# Altium PCB SLT_4U_V100.PcbDoc (part 5 of 6)
Units mm, origin at the board's own origin, x right, y up, seen from the top; angles counter-clockwise.
Board outline 180 x 80 mm, 5 copper layers (Top Layer, Mid-Layer 1, Mid-Layer 2, Mid-Layer 4, Bottom Layer); 1167 components, 840 nets, 3922 pads, 254 vias.
Unrouted connection lines stored in the file: 1943.
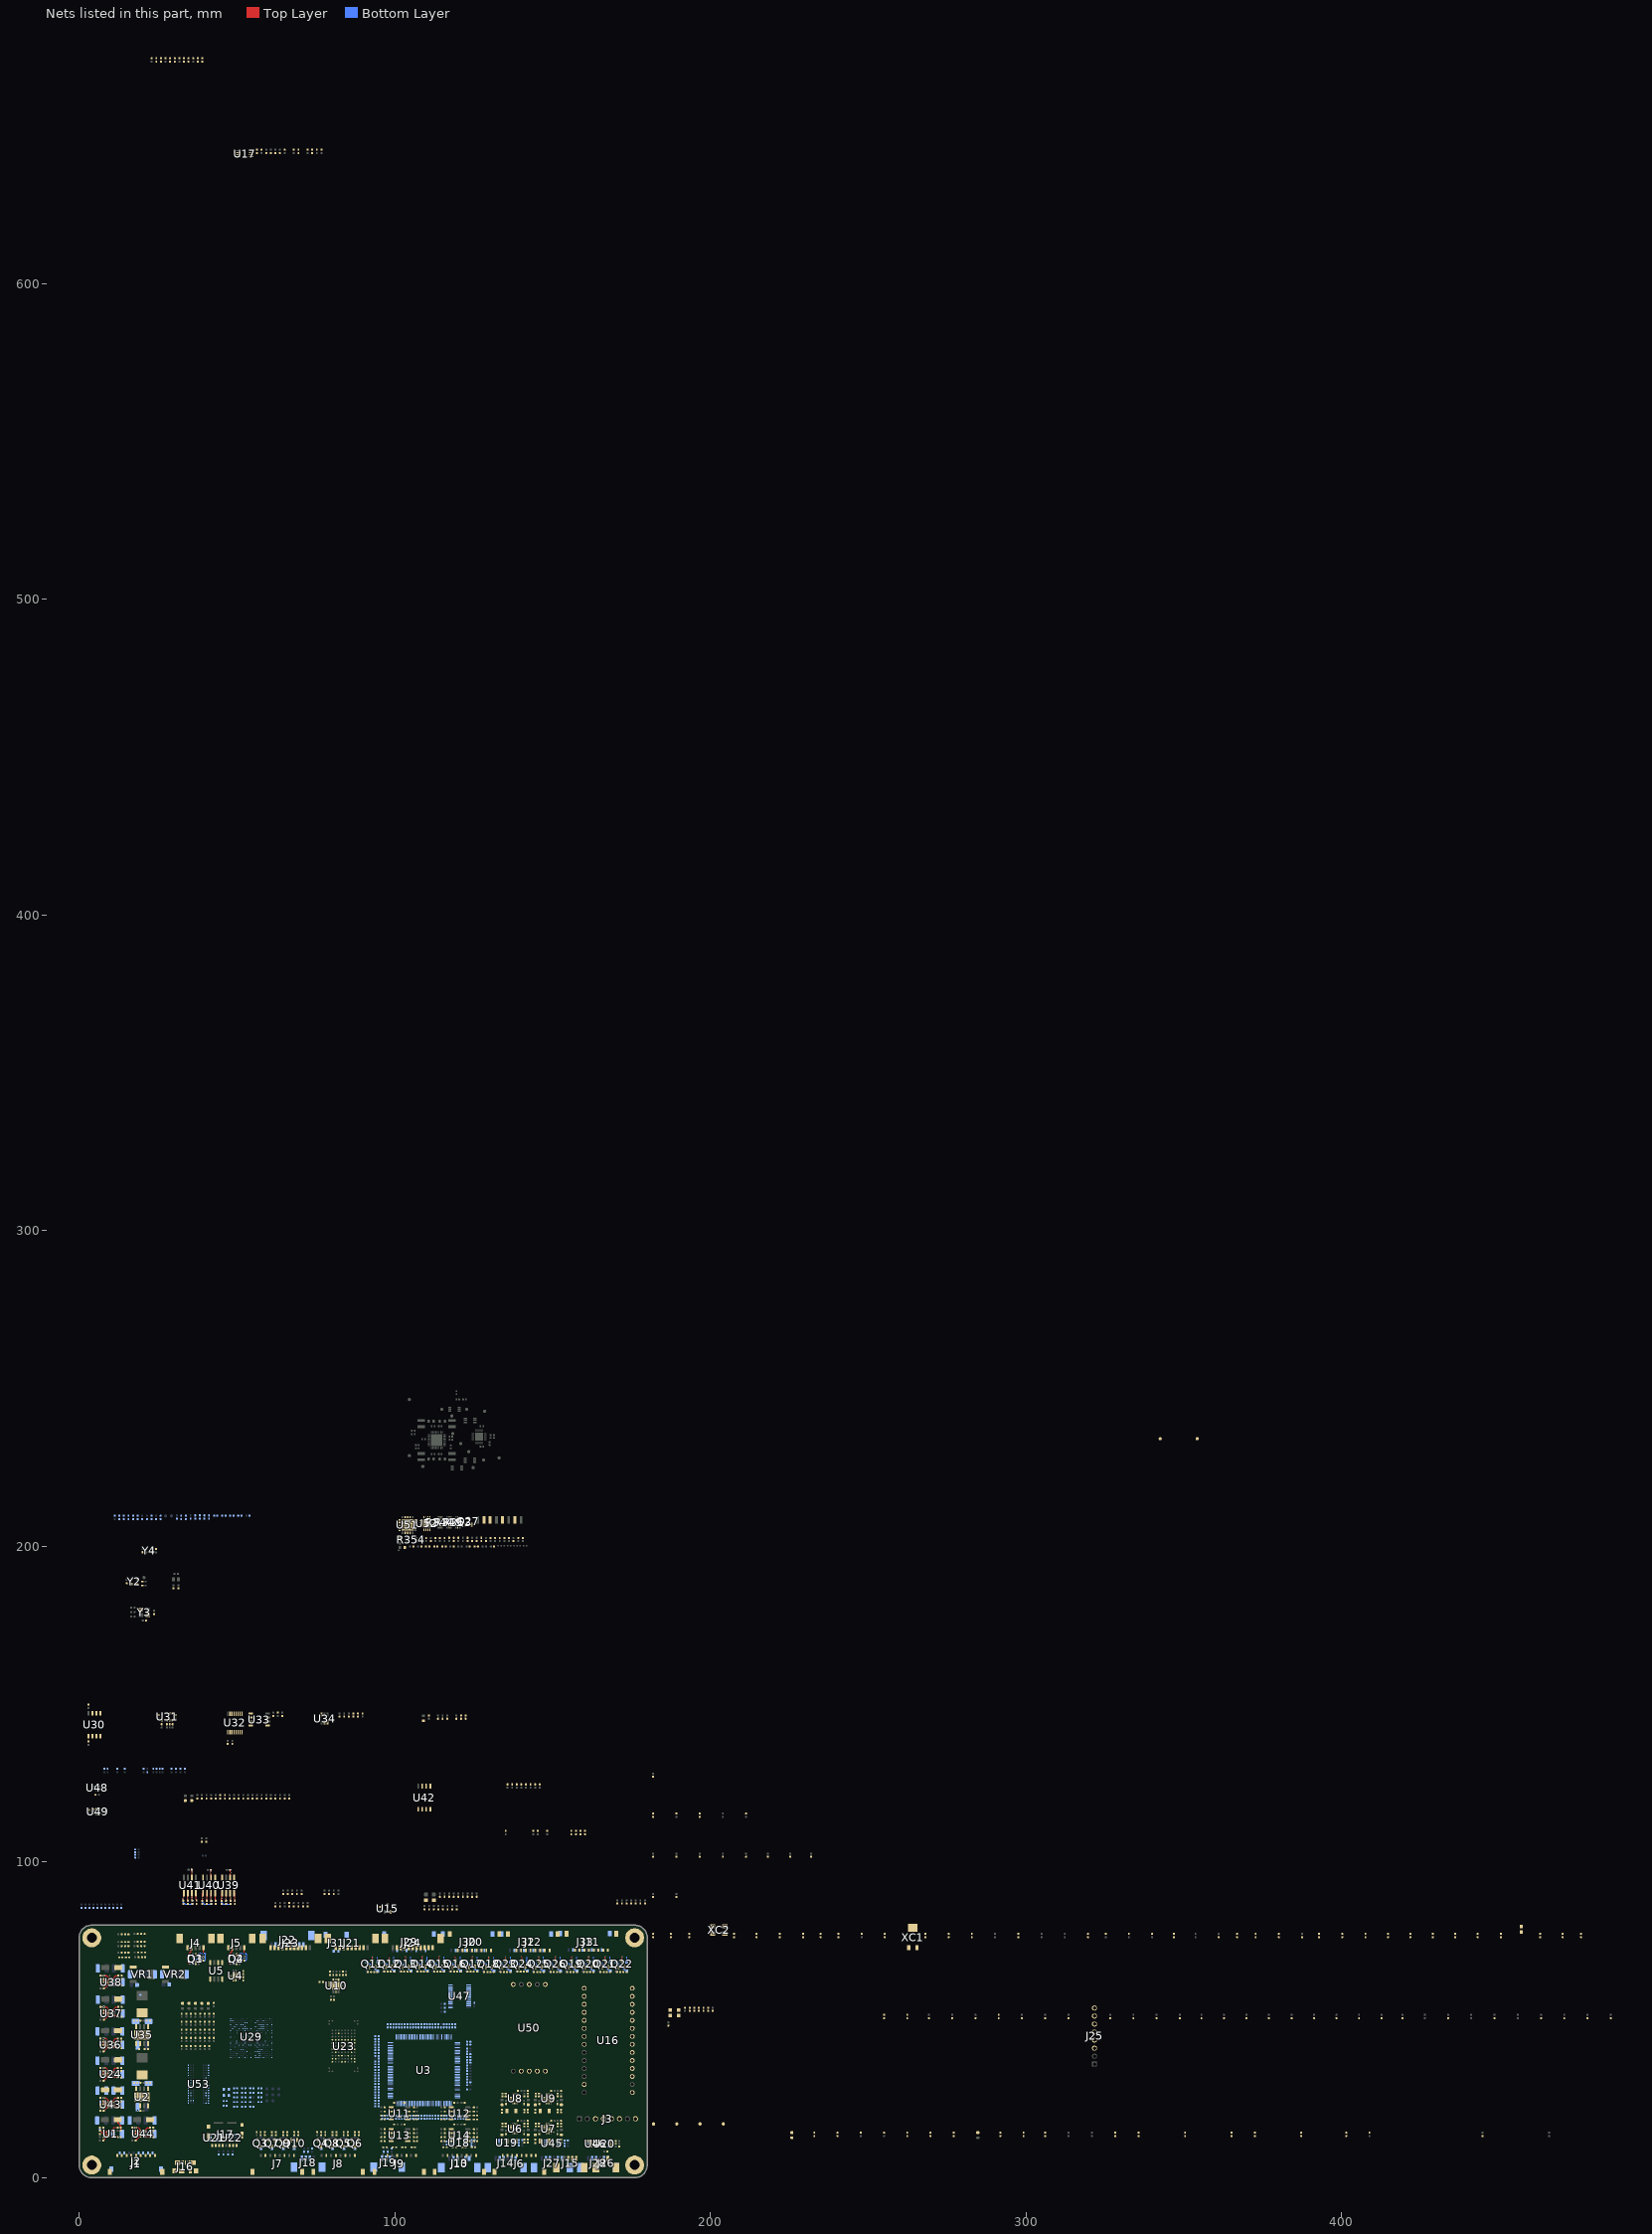
[diagram p5: the nets of this part, all layers, seen from the top]

## Via types
v1: diameter 0.4, hole 0.2, Top Layer to Bottom Layer, 235 vias
v2: diameter 0.4, hole 0.2, Top Layer to Bottom Layer, tented both sides, 18 vias
v3: diameter 0.35, hole 0.15, Top Layer to Bottom Layer, 1 vias

## Nets (pads, with @x,y where several pads share a name; then routed paths per layer and width w, separated by ;. In a path a pad name is that pad's centre, name@x,y a point inside that pad or via, vN(x,y) a via of type N, cw(c..) or ccw(c..) an arc to the next point about the centre after c; other vN are vias at no path point) (continued)
GND: C1.1 C2.1 C3.1 C4.1 C5.1 C6.1 C8.1 C9.1 C10.2 C11.1 C12.1 C13.1 C14.1 C15.1 C16.1 C17.1 C18.1 C19.1 C20.1 C21.2 C22.2 C23.1 C24.1 C25.1 C26.1 C27.1 C28.1 C29.1 C30.1 C31.1 C32.1 C33.1 C34.1 C35.1 C36.1 C37.1 C38.1 C39.1 C40.1 C41.1 C42.1 C43.1 C44.1 C45.1 C46.1 C47.1 C48.1 C49.1 C50.1 C51.1 C52.1 C53.1 C54.1 C57.1 C58.1 C61.1 C62.1 C63.1 C64.1 C65.1 C66.1 C67.1 C68.1 C69.1 C70.1 C71.1 C72.1 C73.1 C74.1 C75.1 C76.1 C79.1 C80.1 C83.1 C84.1 C85.1 C86.1 C87.1 C88.1 C89.1 C90.1 C91.1 C92.1 C93.1 C94.1 C95.1 C96.1 C97.1 C98.1 C99.1 C100.1 C101.1 C102.1 C103.1 C104.1 C105.1 C106.1 C107.1 C108.1 C109.1 C110.1 C111.1 C112.1 C113.1 C114.1 C115.1 C116.1 C117.1 C118.1 C119.1 C120.1 C121.1 C122.1 C123.1 C124.1 C125.1 C126.1 C127.1 C128.1 C129.1 C130.1 C131.1 C132.1 C133.1 C134.1 C135.1 C136.1 C137.1 C138.1 C139.1 C140.1 C141.1 C142.1 C143.1 C144.1 C145.1 C146.1 C147.2 C148.1 C149.1 C150.2 C151.2 C152.2 C153.1 C154.1 C155.1 C156.1 C157.2 C159.1 C160.1 C161.1 C162.1 C163.1 C164.1 C165.1 C166.1 C167.1 C168.1 C169.1 C170.1 C171.1 C172.1 C173.1 C174.1 C175.1 C176.1 C177.1 C178.2 C179.2 C180.2 C181.2 C182.2 C183.2 C184.2 C185.2 C186.2 C187.1 C188.1 C189.1 C190.1 C191.1 C192.1 C193.1 C194.1 C195.1 C196.1 C197.1 C198.1 C199.1 C200.1 C201.1 C202.1 C203.1 C204.1 C205.1 C206.1 C207.1 C208.1 C209.1 C210.1 C211.1 C212.1 C213.1 C214.1 C215.1 C216.1 C217.1 C218.1 C219.1 C220.1 C221.1 C223.1 C225.1 C226.1 C227.1 C228.1 C229.1 C230.1 C231.1 C232.2 C233.2 C234.2 C235.2 C236.2 C237.2 C238.2 C239.2 C240.2 C241.2 C242.2 C243.2 C244.2 C245.2 C246.2 C247.1 C248.2 C249.2 C250.2 C251.2 C252.2 C253.2 C254.2 C255.2 C256.2 C257.2 C258.2 C259.2 C260.2 C261.2 C262.2 C263.2 C264.2 C265.2 C266.2 C267.1 C268.2 C269.2 C270.2 C271.2 C272.2 C273.2 C274.2 C275.2 C276.2 C277.2 C278.2 C279.1 C280.2 C281.2 C282.1 C283.2 C284.2 C285.2 C286.2 C287.2 C288.1 C289.2 C290.1 C291.2 C292.1 C293.2 C294.2 C295.2 C296.2 C297.2 C298.2 C299.1 C300.1 C301.1 C302.1 C303.1 C304.1 C305.1 C306.1 C307.1 C308.1 C309.1 C310.1 C311.1 C312.1 C313.1 C314.1 C315.1 C316.1 C317.1 C318.1 C319.1 C320.1 C321.2 C322.2 C323.2 C324.2 C325.2 C326.2 C327.2 C328.2 C330.2 C331.2 C332.2 C333.2 C334.2 C335.2 C336.2 C337.2 C338.2 C339.2 C340.2 C341.2 C342.2 D1.2 D2.2 D3.2 D4.2 D13.2 D14.2 D15.2 D16.2 D17.2 D18.2 D19.2 H3.1 H4.1 H7.1 H8.1 J1.M1 J1.M2 J2.M1 J2.M2 J3.3 J4.5 J4.M1 J4.M2 J5.5 J5.M1 J5.M2 J6.M1 J6.M2 J7.M1 J7.M2 J8.M1 J8.M2 J9.M1 J9.M2 J10.M1 J10.M2 J11.M1 J11.M2 J12.M1 J12.M2 J13.4 J13.M1 J13.M2 J14.4 J14.M1 J14.M2 J15.4 J15.M1 J15.M2 J16.5 J16.6 J17.G1 J17.G2 J17.G3 J17.G4 J17.P6 J18.4 J18.M1 J18.M2 J19.4 J19.M1 J19.M2 J20.M1 J20.M2 J21.2 J21.M1 J21.M2 J22.2 J22.M1 J22.M2 J23.2 J23.M1 J23.M2 J24.7 J24.10 J24.M1 J24.M2 J25.3 J26.2 J26.M1 J26.M2 J27.4 J27.M1 J27.M2 J28.4 J28.M1 J28.M2 J29.M1 J29.M2 J30.M1 J30.M2 J31.M1 J31.M2 J32.M1 J32.M2 J33.M1 J33.M2 Q3.2 Q4.2 Q5.2 Q6.2 Q7.2 Q8.2 Q9.2 Q10.2 Q11.2 Q12.2 Q13.2 Q14.2 Q15.2 Q16.2 Q17.2 Q18.2 Q19.2 Q20.2 Q21.2 Q22.2 Q23.2 Q24.2 Q25.2 Q26.2 Q27.2 R5.1 R6.1 R8.1 R9.1 R10.1 R110.1 R115.2 R116.2 R122.2 R123.2 R130.2 R132.2 R138.1 R139.2 R140.2 R142.2 R146.1 R147.1 R149.1 R155.1 R156.1 R157.1 R161.1 R162.1 R163.1 R165.1 R167.1 R172.1 R173.1 R178.1 R179.1 R184.1 R185.1 R190.1 R191.1 R194.1 R196.1 R203.2 R204.1 R209.1 R213.2 R217.2 R222.1 R223.2 R224.1 R225.2 R252.2 R253.1 R254.1 R255.1 R256.1 R258.2 R259.2 R261.2 R262.2 R264.2 R265.2 R267.2 R268.2 R295.2 R297.2 R298.2 R301.1 R303.2 R307.1 R310.1 R311.2 R313.2 R315.2 R317.2 R321.1 R323.1 R338.2 R341.1 R348.2 R391.1 R394.1 R409.1 R410.1 R413.1 R414.2 R415.1 R420.1 R421.2 R422.1 R423.1 R428.1 R429.2 R430.1 R431.1 R436.1 R437.2 R438.1 R439.1 R443.1 R448.1 R453.1 R461.1 R462.2 R465.2 R470.1 R471.1 R472.1 R473.1 R478.1 R479.1 R480.1 R481.1 R493.1 R494.1 R495.1 R496.1 R501.1 R502.1 R503.1 R504.1 R505.1 R507.1 R509.1 R536.2 R537.2 R538.2 R539.2 R541.1 R543.2 TP25.0 TP26.0 TP27.0 TP28.0 U1.8 U2.6 U2.9 U3.8 U3.44 U3.61 U3.95 U3.115 U3.135 U3.138 U4.1 U4.17 U5.6 U6.1 U6.5 U6.10 U6.19 U6.21 U6.22 U7.1 U7.5 U7.10 U7.19 U7.21 U7.22 U8.1 U8.5 U8.10 U8.19 U8.21 U8.22 U9.1 U9.5 U9.10 U9.19 U9.21 U9.22 U10.11 U10.25 U10.29 U11.4 U12.4 U13.4 U14.4 U15.3 U16.1 U16.27 U17.4 U18.4 U19.4 U20.4 U21.2 U22.2 U23.G2@80.264,43.688 U23.G3@81.264,43.688 U23.G4@82.264,43.688 U23.G5@83.264,43.688 U23.G6@84.264,43.688 U23.G7@85.264,43.688 U23.G8@86.264,43.688 U23.G9@87.264,43.688 U23.H2@80.264,42.688 U23.H9@87.264,42.688 U23.J5@83.264,41.688 U23.L3@81.264,39.688 U23.L8@86.264,39.688 U23.M4@82.264,38.688 U23.M7@85.264,38.688 U23.P2@80.264,36.688 U23.P9@87.264,36.688 U24.8 U29.A1 U29.A5 U29.A8 U29.A11 U29.A14 U29.A17 U29.A21 U29.AA1 U29.AA8 U29.AA11 U29.AA14 U29.AA17 U29.AA21 U29.D9 U29.D13 U29.E1 U29.E7 U29.E15 U29.E21 U29.F5 U29.F17 U29.G5 U29.G7 U29.G11 U29.G15 U29.G17 U29.H1 U29.H8 U29.H14 U29.H21 U29.J4 U29.J18 U29.K11 U29.L1 U29.L7 U29.L11 U29.L15 U29.L21 U29.N4 U29.N18 U29.P1 U29.P8 U29.P14 U29.P21 U29.R5 U29.R7 U29.R11 U29.R15 U29.R17 U29.T5 U29.T17 U29.U1 U29.U7 U29.U15 U29.U21 U29.V9 U29.V13 U29.W5 U30.4 U31.6 U32.8 U33.4 U34.2 U35.6 U35.9 U36.8 U37.8 U38.8 U39.2 U40.2 U41.2 U42.4 U43.8 U44.8 U45.4 U46.4 U47.12 U47.21 U48.3 U48.8 U48.9 U49.6 U49.7 U50.5 U50.8 U51.3 U51.12 U51.13 U51.28 U51.29 U51.33 U52.3 U52.17 U53.A9 U53.B1 U53.B3 U53.B9 U53.D1 U53.D8 U53.E1 U53.E2 U53.E8 U53.F9 U53.G1 U53.G8 U53.G9 U53.J2 U53.J8 U53.M1 U53.M9 U53.P1 U53.P9 U53.T1 U53.T9 VR1.1 VR2.1 XC1.3 XC2.2 XC2.4 Y2.2 Y3.2 Y3.4 Y4.2 | length 14.1
  Top Layer w0.254: D1.2@12.21,18.415 12.21,17.529 ccw(c12.464,17.529) 12.284,17.349 13.162,16.472 cw(c12.982,16.292) 13.236,16.292 R6.1@13.236,14.867 ; C185.2@35.679,97.536 35.744,97.471 v1@35.744,96.709 ; U41.2@35.745,95.085 35.799,95.943 35.747,95.943 35.747,96.703 v1(35.748,96.704) ; C182.2@41.717,97.504 41.781,97.439 v1@41.781,96.676 ; U40.2@41.783,95.053 41.836,95.911 41.784,95.911 41.784,96.671 v1(41.785,96.672) ; C179.2@47.813,97.504 47.877,97.439 v1@47.877,96.676 ; U39.2@47.879,95.053 47.932,95.911 47.88,95.911 47.88,96.671 v1(47.881,96.672)
  Bottom Layer w0.254: C184.2@35.679,97.536 35.72,97.495 35.72,96.732 v1(35.748,96.704) ; C181.2@41.717,97.504 41.758,97.463 41.758,96.7 v1(41.785,96.672) ; C178.2@47.813,97.504 47.854,97.463 47.854,96.7 v1(47.881,96.672)
  other v1: 18.542,21.336
  other v2: 102.815,205.554 104.015,205.554 105.215,205.554 102.815,206.754 104.015,206.754 105.215,206.754 102.815,207.954 104.015,207.954 105.215,207.954
HD4_A0: R193.2 R194.2 U16.3
HD4_A1: R195.2 R196.2 U16.4
HD4_CH11+: J12.7 U16.16
HD4_CH11-: J12.8 U16.15
HD4_CH12+: J12.6 U16.17
HD4_CH12-: J12.5 U16.18
HD4_CH21+: J12.3 U16.20
HD4_CH21-: J12.4 U16.19
HD4_CH22+: J12.2 U16.21
HD4_CH22-: J12.1 U16.22
HD4_CH31+: J11.2 U16.8
HD4_CH31-: J11.1 U16.7
HD4_CH32+: J11.3 U16.9
HD4_CH32-: J11.4 U16.10
HD4_CH41+: J11.6 U16.12
HD4_CH41-: J11.5 U16.11
HD4_CH42+: J11.7 U16.13
HD4_CH42-: J11.8 U16.14
HEATER_B_1: D5.2 J7.2 Q3.3
HEATER_B_2: D9.2 J7.4 Q7.3
HEATER_B_3: D11.2 J7.6 Q9.3
HEATER_B_4: D12.2 J7.8 Q10.3
HEATER_B_5: D6.2 J8.2 Q4.3
HEATER_B_6: D10.2 J8.4 Q8.3
HEATER_B_7: D7.2 J8.6 Q5.3
HEATER_B_8: D8.2 J8.8 Q6.3
HEATER_PWM_1: R52.2 R152.1
HEATER_PWM_2: R11.2 R159.1
HEATER_PWM_3: R13.2 R164.1
HEATER_PWM_4: R50.2 R166.1
HEATER_PWM_5: R74.2 R153.1
HEATER_PWM_6: R101.2 R160.1
HEATER_PWM_7: R70.2 R154.1
HEATER_PWM_8: R71.2 R158.1
I2C_SCL: R199.2 U16.6 U17.7
I2C_SDA: R200.2 U16.5 U17.6
IF_12V: C3.2 C4.2 J1.1 J1.2 J1.3 JP1.1 R1.2 U1.5
IF_GND: J1.4 J1.5 J1.6
IF_MCU_SHUTDOWN: J1.7 R18.1@475.869,76.233
IF_SOM_USB_N: J2.8 R299.1
IF_SOM_USB_P: J2.7 R300.1
LASER_ADC_1: J23.10 R108.2
LASER_ADC_2: J23.11 R278.2
LASER_DAC_LATCH: J23.7 R91.2 R292.2
LASER_SPI_nCS1: J23.6 R59.2 R291.2
LASER_SW_EXT_CS: J23.9 R37.2 R294.2
LASER_SW_INT_CS: J23.8 R72.2 R293.2
LP_12V: C192.2 C193.2 D18.1 DS9.2 JP10.2 R136.2 R137.2 U43.6
LPM: Q27.1 R331.1 U29.R10
LSM6DSOX_INT: R99.2 R296.2 U49.4
MCP16502_HPM: R333.1 R386.1 R533.2 R536.1
MCU_CONSOLE_RX: J19.3 R49.1 R247.1
MCU_CONSOLE_TX: J19.2 R51.1 R246.1
MCU_HD4_I2C2_SCL: R55.1 R197.2 U17.2 U47.22
MCU_HD4_I2C2_SDA: R53.1 R198.2 U17.3 U47.23
MCU_HD4_I2C_EN: R93.2 R203.1 U17.5
MCU_I2C0_SCL: R18.2@93.836,26.162 R145.1 R399.1 U10.24 U31.4
MCU_I2C0_SDA: R17.2 R144.1 R400.1 U10.27 U31.5
MCU_JTAGSEL: TP2.0 U3.104
MCU_MPD_DAC: R96.1 U50.2
MCU_MPD_EN: R25.1@470.027,76.233 U50.3
MCU_MPD_PWM: R279.1 U50.4
MCU_MRAM_QSPI_CLK: R34.2 U30.6
MCU_MRAM_QSPI_IO0: R32.2 U30.5
MCU_MRAM_QSPI_IO1: R30.2 U30.2
MCU_MRAM_QSPI_IO2: R38.2 U30.3
MCU_MRAM_QSPI_IO3: R60.1 U30.7
MCU_nRESET: J3.6 R63.1 U3.83
MCU_OSCIN: C19.2 R90.1 R109.2 XC2.3
MCU_OSCOUT: C20.2 R92.1 R109.1 XC2.1
MCU_PRAM_SPI1_nCS: R105.2 R288.1 U32.2
MCU_PRAM_SW_nEN: R35.1 R405.1 U32.15
MCU_RAM_QSPI_nCS: R28.2 R396.1 U30.1
MCU_RTC_CLKOUT: R68.2 R397.1 U31.3
MCU_RTC_INT: R69.2 R398.1 U31.7
MCU_SENSOR1_nIRQ: J13.1 R126.1
MCU_SENSOR2_nIRQ: J14.1 R127.1
MCU_SENSOR3_nIRQ: J27.1 R57.2
MCU_SENSOR4_nIRQ: J28.1 R277.2
MCU_SOL_1_IN1: R15.2
MCU_SOL_1_IN2: R97.2
MCU_SOL_2_IN1: R40.1
MCU_SOL_2_IN2: R39.1
MCU_SOL_3_IN1: R46.2
MCU_SOL_3_IN2: R44.2
MCU_SOL_4_IN1: R48.2
MCU_SOL_4_IN2: R47.2
MCU_SOM_GPIO_A: R25.1@99.568,48.658 R392.1
MCU_SOM_GPIO_B: R27.1 R388.1
MCU_SPI0_MISO: J21.5 J23.4 R42.1 R141.2
MCU_SPI0_MOSI: J21.4 J23.3 R43.1
MCU_SPI0_SCK: J21.3 J23.5 R45.1
MCU_STATUS_LED_1: DS11.1 R94.1
MCU_SWDIO: J3.8 R85.1
MCU_TRACESWO: J3.4 R83.1
MCU_TST: TP1.0 U3.85
MCU_TSWCLK: J3.5 R88.1
MCU_UART0_RX_SOM_TX: R24.2 R528.1
MCU_UART0_TX_SOM_RX: R26.2@100.457,18.652 R529.1
MCU_UART1_RX_SOM_TX: R20.2 R525.1
MCU_UART1_TX_SOM_RX: R22.2 R527.1
MIPI_CK_N: R312.2 U29.N20
MIPI_CK_P: R314.2 U29.N21
MIPI_D0_N: R316.2 U29.R18
MIPI_D0_P: R318.2 U29.P18
MIPI_D1_N: R319.2 U29.R20
MIPI_D1_P: R320.2 U29.R21
NetC5_2: C5.2 U1.10 | length 2.6
  Top Layer w0.254: U1.10@10.826,14.543 10.63,14.739 10.63,15.224 cw(c10.884,15.224) 10.704,15.403 11.11,15.809 cw(c11.289,15.629) 11.289,15.883 C5.2@12.186,15.883
NetC6_2: C6.2 U1.7 | length 1.6
  Top Layer w0.254: U1.7@10.827,13.142 11.932,13.142 cw(c11.932,12.888) 12.167,12.985 C6.2@12.186,12.835
NetC7_1: C7.1 D2.1 L1.1 U2.8
NetC7_2: C7.2 U2.1
NetC15_2: C15.2 R61.1 R62.1 R63.2
NetC18_2: C18.2 R110.2 U3.140
NetC59_1: C59.1 L2.1 U6.6 U6.7
NetC59_2: C59.2 U6.3
NetC60_1: C60.1 L3.1 U7.6 U7.7
NetC60_2: C60.2 U7.3
NetC63_2: C63.2 U6.2
NetC64_2: C64.2 U7.2
NetC81_1: C81.1 L4.1 U8.6 U8.7
NetC81_2: C81.2 U8.3
NetC82_1: C82.1 L5.1 U9.6 U9.7
NetC82_2: C82.2 U9.3
NetC85_2: C85.2 U8.2
NetC86_2: C86.2 U9.2
NetC91_2: C91.2 R170.2 U11.3
NetC93_2: C93.2 R171.2 U12.3
NetC97_2: C97.2 R176.2 U11.5
NetC100_2: C100.2 R177.2 U12.5
NetC103_2: C103.2 R182.2 U13.3
NetC105_2: C105.2 R183.2 U14.3
NetC109_2: C109.2 R188.2 U13.5
NetC112_2: C112.2 R189.2 U14.5
NetC128_2: C128.2 C129.2 U23.E4@82.264,45.688
NetC145_2: C145.2 U24.10 | length 2.5
  Top Layer w0.254: U24.10@10.953,33.466 10.768,33.651 10.768,33.904 cw(c11.022,33.904) 10.842,34.083 11.447,34.688 cw(c11.626,34.508) 11.626,34.762 12.138,34.762 C145.2@12.313,34.806
NetC146_2: C146.2 U24.7 | length 1.5
  Top Layer w0.254: U24.7@10.953,32.066 11.9,32.066 cw(c11.9,31.812) 12.079,31.992 12.163,31.908 C146.2@12.313,31.758
NetC158_1: C158.1 D14.1 L6.1 U35.8
NetC158_2: C158.2 U35.1
NetC166_2: C166.2 U36.10 | length 2.5
  Top Layer w0.254: U36.10@10.953,42.737 10.768,42.922 10.768,43.175 cw(c11.022,43.175) 10.842,43.354 11.447,43.959 cw(c11.626,43.779) 11.626,44.033 12.138,44.033 C166.2@12.313,44.077
NetC167_2: C167.2 U36.7 | length 1.5
  Top Layer w0.254: U36.7@10.953,41.337 11.9,41.337 cw(c11.9,41.083) 12.079,41.263 12.163,41.179 C167.2@12.313,41.029
NetC171_2: C171.2 U37.10 | length 2.5
  Top Layer w0.254: U37.10@11.037,52.738 10.852,52.923 10.852,53.176 cw(c11.106,53.176) 10.926,53.355 11.531,53.96 cw(c11.71,53.78) 11.71,54.034 12.222,54.034 C171.2@12.397,54.078
NetC172_2: C172.2 U37.7 | length 1.5
  Top Layer w0.254: U37.7@11.037,51.338 11.984,51.338 cw(c11.984,51.084) 12.163,51.264 12.247,51.18 C172.2@12.397,51.03
NetC175_2: C175.2 C190.2 JP7.2 JP8.2 JP9.1 R433.2 U38.5
  other v1: 9.37,60.19 9.624,64 9.624,64
NetC176_2: C176.2 U38.10 | length 2.5
  Top Layer w0.254: U38.10@11.052,62.668 10.867,62.853 10.867,63.106 cw(c11.121,63.106) 10.941,63.285 11.546,63.89 cw(c11.725,63.71) 11.725,63.964 12.237,63.964 C176.2@12.412,64.008
NetC177_2: C177.2 U38.7 | length 1.5
  Top Layer w0.254: U38.7@11.052,61.268 11.999,61.268 cw(c11.999,61.014) 12.178,61.194 12.262,61.11 C177.2@12.412,60.96
NetC180_1: C180.1 R441.1 R442.2 U39.5 | length 6.8
  Top Layer w0.254: C180.1@45.154,87.717 45.152,87.718 45.152,88.567 v1(45.151,88.568) 45.179,88.596 45.179,89.953 U39.5@45.339,90.113
  Bottom Layer w0.254: v1(45.151,88.568) 45.154,88.566 45.154,87.274 ccw(c45.408,87.274) 45.227,87.095 45.556,86.766 ccw(c45.736,86.946) 45.736,86.692 46.401,86.692 R442.2@46.551,86.692 R441.1@47.948,86.692
NetC183_1: C183.1 R446.1 R447.2 U40.5 | length 6.8
  Top Layer w0.254: C183.1@39.058,87.717 39.056,87.718 39.056,88.567 v1(39.055,88.568) 39.083,88.596 39.083,89.953 U40.5@39.243,90.113
  Bottom Layer w0.254: v1(39.055,88.568) 39.058,88.566 39.058,87.274 ccw(c39.312,87.274) 39.131,87.095 39.46,86.766 ; 39.461,86.765 ccw(c39.64,86.946) 39.639,86.692 40.305,86.692 R447.2@40.455,86.692 R446.1@41.852,86.692
NetC186_1: C186.1 R451.1 R452.2 U41.5 | length 6.8
  Top Layer w0.254: C186.1@33.02,87.749 C186.1@33.02,87.749 33.019,88.599 v1(33.018,88.6) 33.046,88.628 33.046,89.986 U41.5@33.205,90.145
  Bottom Layer w0.254: v1(33.018,88.6) 33.02,88.598 33.02,87.306 ccw(c33.274,87.306) 33.094,87.127 33.423,86.798 ccw(c33.602,86.978) 33.602,86.724 R451.1@35.814,86.724
NetC196_2: C196.2 U43.10 | length 2.5
  Top Layer w0.254: U43.10@10.95,23.941 10.765,24.126 10.765,24.379 cw(c11.019,24.379) 10.839,24.558 11.444,25.163 cw(c11.623,24.983) 11.623,25.237 12.135,25.237 C196.2@12.31,25.281
NetC197_2: C197.2 U43.7 | length 1.5
  Top Layer w0.254: U43.7@10.95,22.541 11.897,22.541 cw(c11.897,22.287) 12.076,22.467 12.16,22.383 C197.2@12.31,22.233
NetC202_2: C202.2 U44.10 | length 2.5
  Top Layer w0.254: U44.10@21.116,14.543 20.931,14.728 20.931,14.981 cw(c21.185,14.981) 21.005,15.16 21.61,15.765 cw(c21.789,15.585) 21.789,15.839 22.301,15.839 C202.2@22.476,15.883
NetC203_2: C203.2 U44.7 | length 1.5
  Top Layer w0.254: U44.7@21.116,13.143 22.063,13.143 cw(c22.063,12.889) 22.242,13.069 22.326,12.985 C203.2@22.476,12.835
NetC300_2: C300.2 R340.1 R402.1 R535.1 U29.J7 U51.2
NetC301_2: C301.2 C302.2 U53.B2
NetC303_2: C303.2 U53.D9
NetC304_2: C304.2 U53.G7
NetC305_2: C305.2 U53.K8
NetC306_2: C306.2 U53.K2
NetC307_2: C307.2 U53.R9
NetC308_2: C308.2 U53.R1
NetC309_2: C309.2 U53.N9
NetC310_2: C310.2 U53.N1
NetC311_2: C311.2 U53.A1
NetC312_2: C312.2 U53.A8
NetC313_2: C313.2 U53.C1
NetC314_2: C314.2 U53.C9
NetC315_2: C315.2 U53.D2
NetC316_2: C316.2 U53.E9
NetC317_2: C317.2 U53.F1
NetC318_2: C318.2 U53.H2
NetC319_2: C319.2 C320.2 U53.H9
NetC322_1: C322.1 U29.N6
NetC323_1: C323.1 C324.1 C325.1 C326.1 C327.1 C328.1 C330.1 C331.1 C332.1 C334.1 C335.1 C336.1 C338.1 C339.1 C340.1 U29.AA5 U29.M11 U29.N9 U29.N12 U29.P3 U29.P13 U29.T6 U29.T7 U29.T9 U29.U3 U29.U5 U29.U6 U29.W8 U29.Y2
NetD20_2: D20.2 DZ1.2 | length 4.6
  Bottom Layer w0.254: DZ1.2@91.156,68.323 91.469,68.01 91.741,68.01 94.006,65.744 94.245,65.744 94.568,65.421 D20.2@94.568,65.408
NetD21_2: D21.2 DZ2.2 | length 4.6
  Bottom Layer w0.254: DZ2.2@96.422,68.45 96.735,68.137 97.007,68.137 99.273,65.871 99.511,65.871 99.834,65.548 D21.2@99.834,65.535
NetD22_2: D22.2 DZ3.2 | length 4.6
  Bottom Layer w0.254: DZ3.2@101.688,68.45 102.001,68.137 102.273,68.137 104.539,65.871 104.778,65.871 105.101,65.548 D22.2@105.101,65.535
NetD23_2: D23.2 DZ4.2 | length 4.6
  Bottom Layer w0.254: DZ4.2@106.955,68.45 107.268,68.137 107.54,68.137 109.805,65.871 110.044,65.871 110.367,65.548 D23.2@110.367,65.535
NetD24_2: D24.2 DZ5.2 | length 4.6
  Bottom Layer w0.254: DZ5.2@112.221,68.434 112.534,68.121 112.806,68.121 115.071,65.855 115.31,65.855 115.633,65.532 D24.2@115.633,65.519
NetD25_2: D25.2 DZ6.2 | length 4.6
  Bottom Layer w0.254: DZ6.2@117.487,68.45 117.8,68.137 118.072,68.137 120.338,65.871 120.576,65.871 120.899,65.548 D25.2@120.899,65.535
NetD26_2: D26.2 DZ7.2 | length 4.6
  Bottom Layer w0.254: DZ7.2@122.754,68.45 123.066,68.137 123.338,68.137 125.604,65.871 125.843,65.871 126.166,65.548 D26.2@126.166,65.535
NetD27_2: D27.2 DZ8.2 | length 4.6
  Bottom Layer w0.254: DZ8.2@128.02,68.323 128.333,68.01 128.605,68.01 130.87,65.744 131.109,65.744 131.432,65.421 D27.2@131.432,65.408
NetD28_2: D28.2 DZ9.2 | length 4.6
  Bottom Layer w0.254: DZ9.2@154.351,68.348 154.664,68.035 154.936,68.035 157.202,65.77 157.44,65.77 157.763,65.447 D28.2@157.763,65.434
NetD29_2: D29.2 DZ10.2 | length 4.6
  Bottom Layer w0.254: DZ10.2@159.617,68.348 159.93,68.035 160.202,68.035 162.468,65.77 162.706,65.77 163.029,65.447 D29.2@163.029,65.434
NetD30_2: D30.2 DZ11.2 | length 4.6
  Bottom Layer w0.254: DZ11.2@164.884,68.348 165.197,68.035 165.468,68.035 167.734,65.77 167.973,65.77 168.296,65.447 D30.2@168.296,65.434
NetD31_2: D31.2 DZ12.2 | length 4.6
  Bottom Layer w0.254: DZ12.2@170.15,68.348 170.463,68.035 170.735,68.035 173,65.77 173.239,65.77 173.562,65.447 D31.2@173.562,65.434
NetD32_2: D32.2 DZ13.2 | length 4.6
  Bottom Layer w0.254: DZ13.2@133.286,68.348 133.599,68.035 133.871,68.035 136.136,65.77 136.375,65.77 136.698,65.447 D32.2@136.698,65.434
NetD33_2: D33.2 DZ14.2 | length 4.6
  Bottom Layer w0.254: DZ14.2@138.552,68.45 138.865,68.137 139.137,68.137 141.403,65.871 141.641,65.871 141.964,65.548 D33.2@141.964,65.535
NetD34_2: D34.2 DZ15.2 | length 4.6
  Bottom Layer w0.254: DZ15.2@143.819,68.348 144.132,68.035 144.403,68.035 146.669,65.77 146.908,65.77 147.231,65.447 D34.2@147.231,65.434
NetD35_2: D35.2 DZ16.2 | length 4.6
  Bottom Layer w0.254: DZ16.2@149.085,68.348 149.398,68.035 149.67,68.035 151.935,65.77 152.174,65.77 152.497,65.447 D35.2@152.497,65.434
NetDS1_1: DS1.1 R8.2
NetDS2_1: DS2.1 R9.2
NetDS3_1: DS3.1 R253.2
NetDS4_1: DS4.1 R256.2
NetDS5_1: DS5.1 R413.2
NetDS6_1: DS6.1 R420.2
NetDS7_1: DS7.1 R428.2
NetDS8_1: DS8.1 R436.2
NetDS9_1: DS9.1 R138.2
NetDS10_1: DS10.1 R222.2
NetDS11_2: DS11.2 R298.1
NetDS12_2: DS12.2 R537.1
NetDS13_2: DS13.2 R538.1
NetJ5_4: J5.4 R119.2 | length 3.5
  Top Layer w0.254: R119.2@47.498,69.867 47.498,70.634 cw(c47.752,70.634) 47.572,70.813 48.395,71.636 ccw(c48.215,71.816) 48.469,71.816 48.469,72.793 J5.4@48.574,72.898
NetJ13_2: J13.2 R207.2 U18.6
NetJ13_5: J13.5 R208.2 U18.7
NetJ14_2: J14.2 R215.2 U19.6
NetJ14_5: J14.5 R216.2 U19.7
NetJ15_2: J15.2 R218.2 U20.7
NetJ15_3: J15.3 R219.2 U20.6
NetJ27_2: J27.2 R192.2 U45.6
NetJ27_5: J27.5 R347.2 U45.7
NetJ28_2: J28.2 R463.2 U46.6
NetJ28_5: J28.5 R464.2 U46.7
NetJ31_1: J31.1 U50.6
NetJ31_2: J31.2 U50.10
NetJP4_1: JP4.1 R409.2
NetJP4_2: JP4.2 R410.2 U34.3
NetL7_1: L7.1 U51.11
NetL8_1: L8.1 U51.14
NetL9_1: L9.1 U51.27
NetL10_1: L10.1 U51.30
NetQ1_1: Q1.1 R112.2 R113.2 | length 4.2
  Top Layer w0.254: v1(39.37,69.85) R113.2@39.37,69.867
  Bottom Layer w0.254: Q1.1@35.971,70.286 36.144,69.753 36.548,69.349 ccw(c36.728,69.528) 36.728,69.274 38.689,69.274 ccw(c38.689,69.528) 38.869,69.349 39.22,69.7 v1(39.37,69.85)
NetQ1_3: Q1.3 R114.1 | length 3.3
  Top Layer w0.254: R114.1@34.544,68.817 34.544,68.199 ccw(c34.798,68.199) 34.798,67.945 v1(35.052,67.945)
  Bottom Layer w0.254: v1(35.052,67.945) 36.748,67.945 Q1.3@36.921,68.286
NetQ2_1: Q2.1 R117.2 R118.2 | length 4.2
  Top Layer w0.254: v1(52.324,69.85) R118.2@52.324,69.867
  Bottom Layer w0.254: Q2.1@48.925,70.286 49.098,69.753 49.502,69.349 ccw(c49.682,69.528) 49.682,69.274 51.643,69.274 ccw(c51.643,69.528) 51.823,69.349 52.174,69.7 v1(52.324,69.85)
NetQ2_3: Q2.3 R119.1 | length 3.3
  Top Layer w0.254: R119.1@47.498,68.817 47.498,68.199 ccw(c47.752,68.199) 47.752,67.945 v1(48.006,67.945)
  Bottom Layer w0.254: v1(48.006,67.945) 49.702,67.945 Q2.3@49.875,68.286
NetQ3_1: Q3.1 R152.2 R155.2
NetQ4_1: Q4.1 R153.2 R156.2
NetQ5_1: Q5.1 R154.2 R157.2
NetQ6_1: Q6.1 R158.2 R161.2
NetQ7_1: Q7.1 R159.2 R162.2
NetQ8_1: Q8.1 R160.2 R163.2
NetQ9_1: Q9.1 R164.2 R165.2
NetQ10_1: Q10.1 R166.2 R167.2
NetQ11_1: Q11.1 R466.1 R470.2
NetQ12_1: Q12.1 R467.1 R471.2
NetQ13_1: Q13.1 R468.1 R472.2
NetQ14_1: Q14.1 R469.1 R473.2
NetQ15_1: Q15.1 R474.1 R478.2
NetQ16_1: Q16.1 R475.1 R479.2
NetQ17_1: Q17.1 R476.1 R480.2
NetQ18_1: Q18.1 R477.1 R481.2
NetQ19_1: Q19.1 R201.1 R493.2
NetQ20_1: Q20.1 R202.1 R494.2
NetQ21_1: Q21.1 R491.1 R495.2
NetQ22_1: Q22.1 R492.1 R496.2
NetQ23_1: Q23.1 R497.1 R501.2
NetQ24_1: Q24.1 R498.1 R502.2
NetQ25_1: Q25.1 R499.1 R503.2
NetQ26_1: Q26.1 R500.1 R504.2
NetQ27_3: Q27.3 R350.2 Y2.1
NetR1_1: R1.1 R4.1 U1.1 | length 2.5
  Top Layer w0.254: R1.1@7.648,15.883 R4.1@7.648,14.867 7.963,14.867 cw(c7.963,14.613) 8.142,14.793 8.318,14.617 ccw(c8.497,14.797) 8.497,14.543 U1.1@8.979,14.543
NetR2_1: R2.1 U1.3 | length 1.7
  Top Layer w0.254: R2.1@7.648,12.835 7.661,12.835 7.832,13.006 7.832,13.138 8.312,13.618 U1.3@8.976,13.618
NetR3_1: R3.1 U1.4 | length 2
  Top Layer w0.254: R3.1@7.652,11.819 7.661,11.819 7.846,12.004 7.846,12.013 8.778,12.945 8.778,13.12 8.801,13.143 U1.4@8.976,13.143
NetR4_2: R4.2 R5.2 U1.2 | length 2.9
  Top Layer w0.254: R4.2@6.598,14.867 6.611,14.867 6.796,14.682 6.796,14.669 7.469,13.996 7.503,13.996 R5.2@7.648,13.851 ; R5.2@7.542,14.069 8.977,14.069 U1.2@8.979,14.067
NetR7_1: R7.1 R10.2 U2.4
NetR129_1: R129.1 R204.2 U43.2 | length 2.3
  Top Layer w0.254: R204.2@7.761,23.241 7.761,23.744 ; R129.1@7.761,24.257 7.761,23.744 ; U43.2@8.905,23.467 8.828,23.467 8.826,23.469 8.579,23.469 8.304,23.744 7.761,23.744
NetR136_1: R136.1 U43.3 | length 1.6
  Top Layer w0.254: R136.1@7.761,22.225 7.936,22.287 ccw(c7.77,22.479) 7.948,22.299 8.59,22.94 cw(c8.769,22.76) 8.768,23.014 U43.3@9.099,23.016
NetR137_1: R137.1 U43.4 | length 2
  Top Layer w0.254: R137.1@7.761,21.209 7.92,21.368 7.992,21.368 8.902,22.278 8.902,22.518 8.925,22.541 U43.4@9.1,22.541
NetR146_2: R146.2 U10.23
NetR147_2: R147.2 U10.28
NetR148_2: R148.2 U10.22
NetR149_2: R149.2 U10.1
NetR168_1: R168.1 U11.1 U11.2
NetR169_1: R169.1 U12.1 U12.2
NetR174_1: R174.1 U11.6 U11.7
NetR175_1: R175.1 U12.6 U12.7
NetR180_1: R180.1 U13.1 U13.2
NetR181_1: R181.1 U14.1 U14.2
NetR186_1: R186.1 U13.6 U13.7
NetR187_1: R187.1 U14.6 U14.7
NetR211_1: R211.1 R224.2 U44.2 | length 2.3
  Top Layer w0.254: R224.2@17.927,13.843 17.927,14.346 ; R211.1@17.927,14.859 17.927,14.346 ; U44.2@19.071,14.069 18.994,14.069 18.992,14.071 18.745,14.071 18.47,14.346 17.927,14.346
NetR212_1: R212.1 U44.3 | length 1.6
  Top Layer w0.254: R212.1@17.927,12.827 18.102,12.889 ccw(c17.936,13.081) 18.114,12.901 18.756,13.542 cw(c18.935,13.362) 18.934,13.616 U44.3@19.266,13.618
NetR214_1: R214.1 U44.4 | length 2
  Top Layer w0.254: R214.1@17.927,11.811 18.086,11.97 18.158,11.97 19.068,12.88 19.068,13.12 19.091,13.143 U44.4@19.266,13.143
NetR249_1: R249.1 R254.2 U24.2 | length 2.3
  Top Layer w0.254: R254.2@7.764,32.766 7.764,33.269 ; R249.1@7.764,33.782 7.764,33.269 ; U24.2@8.908,32.992 8.831,32.992 8.829,32.994 8.582,32.994 8.307,33.269 7.764,33.269
NetR250_1: R250.1 U24.3 | length 1.6
  Top Layer w0.254: R250.1@7.764,31.75 7.939,31.812 ccw(c7.773,32.004) 7.951,31.824 8.593,32.465 cw(c8.772,32.285) 8.771,32.539 U24.3@9.103,32.541
NetR251_1: R251.1 U24.4 | length 2
  Top Layer w0.254: R251.1@7.764,30.734 7.923,30.893 7.995,30.893 8.905,31.803 8.905,32.043 8.928,32.066 U24.4@9.103,32.066
NetR259_1: R259.1
NetR262_1: R262.1
NetR265_1: R265.1
NetR268_1: R268.1
NetR286_2: R286.2
NetR289_2: R289.2 R295.1 U48.5
NetR297_1: R297.1 R490.2 U49.1
NetR299_2: R299.2 U29.B3
NetR300_2: R300.2 U29.A3
NetR301_2: R301.2 U29.C6
NetR302_1: R302.1 U29.H4
NetR303_1: R303.1 U29.AA9
NetR306_1: R306.1 U29.W15
NetR307_2: R307.2 U29.D8
NetR310_2: R310.2 U29.B7
NetR311_1: R311.1 U29.P16
NetR313_1: R313.1 U29.K15
NetR315_1: R315.1 U29.J10
NetR317_1: R317.1 U29.D14
NetR321_2: R321.2 U29.R19
NetR322_1: R322.1 Y2.3
NetR326_1: R326.1 Y4.3
NetR331_2: R331.2 U51.22
NetR333_2: R333.2 U51.23
NetR335_2: R335.2 U51.8
NetR336_2: R336.2 U52.16
NetR337_2: R337.2 R526.1 U52.1
NetR338_1: R338.1 U52.6
NetR342_1: R342.1 U29.D19 U51.1
NetR343_1: R343.1 U51.5
NetR345_1: R345.1 U51.6
NetR346_2: R346.2 R348.1 U51.18
NetR386_2: R386.2 U29.N15
NetR401_2: R401.2 U31.1
NetR403_1: R403.1 U33.7
NetR404_1: R404.1 U33.3
NetR406_1: R406.1 U32.1
NetR407_1: R407.1 R408.2 U34.6
NetR412_1: R412.1 R415.2 U35.4
NetR417_1: R417.1 R422.2 U36.2 | length 2.3
  Top Layer w0.254: R422.2@7.764,42.037 7.764,42.54 ; R417.1@7.764,43.053 7.764,42.54 ; U36.2@8.908,42.263 8.831,42.263 8.829,42.265 8.582,42.265 8.307,42.54 7.764,42.54
NetR418_1: R418.1 U36.3 | length 1.6
  Top Layer w0.254: R418.1@7.764,41.021 7.939,41.083 ccw(c7.773,41.275) 7.951,41.095 8.593,41.736 cw(c8.772,41.556) 8.771,41.81 U36.3@9.103,41.812
NetR419_1: R419.1 U36.4 | length 2
  Top Layer w0.254: R419.1@7.764,40.005 7.923,40.164 7.995,40.164 8.905,41.074 8.905,41.314 8.928,41.337 U36.4@9.103,41.337
NetR425_1: R425.1 R430.2 U37.2 | length 2.3
  Top Layer w0.254: R430.2@7.848,52.038 7.848,52.541 ; R425.1@7.848,53.054 7.848,52.541 ; U37.2@8.992,52.264 8.915,52.264 8.913,52.266 8.666,52.266 8.391,52.541 7.848,52.541
NetR426_1: R426.1 U37.3 | length 1.6
  Top Layer w0.254: R426.1@7.848,51.022 8.023,51.084 ccw(c7.856,51.276) 8.035,51.095 8.676,51.737 cw(c8.856,51.557) 8.854,51.811 U37.3@9.187,51.813
NetR427_1: R427.1 U37.4 | length 2
  Top Layer w0.254: R427.1@7.848,50.006 8.006,50.165 8.079,50.165 8.989,51.074 8.989,51.315 9.012,51.338 U37.4@9.187,51.338
NetR433_1: R433.1 R438.2 U38.2 | length 2.3
  Top Layer w0.254: R438.2@7.863,61.968 7.863,62.471 ; R433.1@7.863,62.984 7.863,62.471 ; U38.2@9.007,62.194 8.93,62.194 8.928,62.196 8.681,62.196 8.406,62.471 7.863,62.471
NetR434_1: R434.1 U38.3 | length 1.6
  Top Layer w0.254: R434.1@7.863,60.952 8.038,61.014 ccw(c7.871,61.206) 8.05,61.026 8.691,61.667 cw(c8.871,61.487) 8.869,61.741 U38.3@9.201,61.743
NetR435_1: R435.1 U38.4 | length 2
  Top Layer w0.254: R435.1@7.863,59.936 8.022,60.095 8.094,60.095 9.004,61.005 9.004,61.245 9.027,61.268 U38.4@9.202,61.268
NetR440_2: R440.2 R441.2 U39.7 | length 2.4
  Top Layer w0.254: U39.7@47.879,90.113 47.876,90.11 47.876,88.625 v1(47.872,88.622) 47.9,88.594 47.9,87.789 R440.2@47.948,87.742
NetR442_1: R442.1 R444.2 U39.6 | length 2.4
  Top Layer w0.254: R444.2@46.551,87.742 v1(46.551,88.614) 46.578,88.642 46.578,89.255 46.556,89.255 U39.6@46.609,90.113
NetR443_2: R443.2 U39.8 | length 2.2
  Top Layer w0.254: U39.8@49.149,90.113 49.26,90.002 49.26,88.076 R443.2@49.345,87.992
NetR445_2: R445.2 R446.2 U40.7 | length 2.4
  Top Layer w0.254: U40.7@41.783,90.113 41.78,90.11 41.78,88.625 v1(41.776,88.622) 41.804,88.594 41.804,87.789 R445.2@41.852,87.742
NetR447_1: R447.1 R449.2 U40.6 | length 2.4
  Top Layer w0.254: R449.2@40.455,87.742 v1(40.455,88.614) 40.482,88.642 40.482,89.255 40.46,89.255 U40.6@40.513,90.113
NetR448_2: R448.2 U40.8 | length 2.2
  Top Layer w0.254: U40.8@43.053,90.113 43.164,90.002 43.164,88.076 R448.2@43.249,87.992
NetR450_2: R450.2 R451.2 U41.7 | length 2.4
  Top Layer w0.254: U41.7@35.745,90.145 35.742,90.142 35.742,88.657 v1(35.739,88.654) 35.767,88.626 35.767,87.821 R450.2@35.814,87.774
NetR452_1: R452.1 R454.2 U41.6 | length 2.4
  Top Layer w0.254: R454.2@34.417,87.774 v1(34.417,88.646) 34.445,88.674 34.445,89.287 34.423,89.287 U41.6@34.475,90.145
NetR453_2: R453.2 U41.8 | length 2.2
  Top Layer w0.254: U41.8@37.015,90.145 37.127,90.034 37.127,88.108 R453.2@37.211,88.024
NetR482_2: R482.2 U47.1
NetR483_2: R483.2 U47.3
NetR484_2: R484.2 U48.6
NetR489_2: R489.2 U49.12
NetR526_2: R526.2 U29.D5
NetR531_2: R531.2 U29.H13
NetR532_2: R532.2 U29.C16
NetR539_1: R539.1 U53.L8
NetU51_24: U51.24
NTC1-: J9.2 R170.1 R172.2
NTC2-: J9.4 R176.1 R178.2
NTC3-: J9.6 R182.1 R184.2
NTC4-: J9.8 R188.1 R190.2
NTC5-: J10.2 R171.1 R173.2
NTC6-: J10.4 R177.1 R179.2
NTC7-: J10.6 R183.1 R185.2
NTC8-: J10.8 R189.1 R191.2
NTRST_PC25: C299.2 J25.6 R534.1 U29.B1
OBC_CANH: J1.8 R440.1 R445.1 R450.1
OBC_CANL: J1.9 R444.1 R449.1 R454.1
OBC_VS_SOM_SPI_SG_CS: J2.1 R356.1
OBC_VS_SOM_SPI_SG_MISO: J2.4 R358.1
OBC_VS_SOM_SPI_SG_MOSI: J2.3 R361.1
OBC_VS_SOM_SPI_SG_SCK: J2.2 R486.1
PA00: R11.1 U3.102
PA01: R13.1 U3.99
PA02: R15.1 U3.93
PA03: R17.1 U3.91
PA04: R18.1@94.886,26.162 U3.77
PA05: R20.1 U3.73
PA06: R22.1 U3.114
PA07_XIN32: C16.2 U3.35 XC1.1
PA08_XOUT32: C17.2 U3.36 XC1.2
PA09: R24.1 U3.75
PA10: R26.1@100.457,19.702 U3.66
PA11: R28.1 U3.64
PA12: R30.1 U3.68
PA13: R32.1 U3.42
PA14: R34.1 U3.51
PA15: R36.1 U3.49
PA16: R37.1 U3.45
PA17: R38.1 U3.25
PA18: J21.9 R272.2 U3.24
PA19: C213.2 R143.1 U3.23
PA20: C215.2 R150.1 U3.22
PA21: C216.2 R151.1 U3.32
PA22: R44.1 U3.37
PA23: R46.1 U3.46
PA24: R47.1 U3.56
PA25: R48.1 U3.59
PA26: R50.1 U3.62
PA27: R52.1 U3.70
PA28: R54.1 U3.112
PA29: R56.1 U3.129
PA30: R58.1 U3.116
PA31: R59.1 U3.118
PB00: C225.2 R73.2 U3.21
PB01: C226.2 R75.2 U3.20
PB02: C227.2 R77.2 U3.26
PB03: C228.2 R79.2 U3.31
PB04: R81.2 U3.105
PB05: R83.2 R86.2 U3.109
PB06: R85.2 U3.79
PB07: R88.2 U3.89
PB08: R90.2 U3.141
PB09: R92.2 U3.142
PB12: R94.2 U3.87
PB13: R96.2 U3.144
PC00: R278.1 U3.11
PC01: C217.2 R64.1 U3.38
PC02: R66.1 U3.39
PC03: R68.1 U3.40
PC04: R69.1 U3.41
PC05: R70.1 U3.58
PC06: R71.1 U3.54
PC07: R72.1 U3.48
PC08: R74.1 U3.82
PC09: R76.1 U3.86
PC10: R78.1 U3.90
PC11: R80.1 U3.94
PC12: R82.1 U3.17
PC13: C218.2 R84.1 U3.19
PC14: R87.1 U3.97
PC15: C219.2 R89.1 U3.18
PC16: R91.1 U3.100
PC17: R93.1 U3.103
PC18: R95.1 U3.111
PC19: R97.1 U3.117
PC20: R98.1 U3.120
PC21: R99.1 U3.122
PC22: R100.1 U3.124
PC23: R101.1 U3.127
PC24: R102.1 U3.130
PC25: R286.1 U3.133
PC26: R103.1 U3.13
PC27: R104.1 U3.12
PC28: R105.1 U3.76
PC29: C220.2 R106.1 U3.16
PC30: C221.2 R107.1 U3.15
PC31: C223.2 R108.1 U3.14
PD00: R12.2 U3.1
PD01: R14.2 U3.132
PD02: R16.2 U3.131
PD03: R18.2@475.869,77.233 U3.128
PD04: R19.2 U3.126
PD05: R21.2 U3.125
PD06: R23.2 U3.121
PD07: R25.2@470.027,77.233 U3.119
PD08: R26.2@450.469,77.233 U3.113
PD09: R25.2@99.568,47.608 U3.110
PD10: R27.2 U3.101
PD11: R29.2 U3.98
PD12: R31.2 U3.92
PD13: R33.2 U3.88
PD14: R35.2 U3.84
PD15: R131.2 U3.106
PD16: R133.2 U3.78
PD17: R39.2 U3.74
PD18: R40.2 U3.69
PD19: R41.1 U3.67
PD20: R42.2 U3.65
PD21: R43.2 U3.63
PD22: R45.2 U3.60
PD23: R126.2 U3.57
PD24: R127.2 U3.55
PD25: R49.2 U3.52
PD26: R51.2 U3.53
PD27: R53.2 U3.47
PD28: R55.2 U3.71
PD29: R57.1 U3.108
PD30: R277.1 U3.34
PD31: R60.2 U3.2
PE00: R279.2 U3.4
PE01: R65.2 U3.6
PE02: R67.2 U3.7
PE03: C229.2 R281.2 U3.10
PE04: C230.2 R282.2 U3.27
PE05: C231.2 R283.2 U3.28
PHOTO_ADC_CONV: J21.8 R36.2 R271.2
PHOTO_ADC_CS: J21.7 R12.1 R270.2
PHOTO_SPI0_nCS2: J21.6 R31.1 R269.2
POW_ONOFF_BUCK_PERI: R133.1 R411.2 R414.1 U35.5
POW_ONOFF_HD4: R21.1 R424.2 R429.1 U37.1 | length 2.5
  Top Layer w0.254: v1(7.859,54.078) 8.479,54.078 cw(c8.479,53.824) 8.659,54.004 9.315,53.348 cw(c9.135,53.168) 9.389,53.168 9.389,52.937 U37.1@9.19,52.738
POW_ONOFF_HEATER: R131.1 R210.2 R223.1 U44.1 | length 2.5
  Top Layer w0.254: v1(17.938,15.883) 18.559,15.883 cw(c18.559,15.629) 18.738,15.809 19.394,15.153 cw(c19.214,14.974) 19.468,14.974 19.468,14.742 U44.1@19.269,14.543
POW_ONOFF_LP: R26.1@450.469,76.233 R128.2 R139.1 U43.1 | length 2.5
  Top Layer w0.254: v1(7.772,25.281) 8.393,25.281 cw(c8.393,25.027) 8.572,25.207 9.228,24.551 cw(c9.048,24.372) 9.302,24.372 9.302,24.14 U43.1@9.103,23.941
POW_ONOFF_Solenoid: R23.1 R432.2 R437.1 U38.1 | length 2.5
  Top Layer w0.254: v1(7.874,64.008) 8.495,64.008 cw(c8.495,63.754) 8.674,63.934 9.33,63.278 cw(c9.15,63.099) 9.404,63.099 9.404,62.867 U38.1@9.205,62.668
POW_ONOFF_SOM: R16.1 R248.2 R252.1 U24.1 | length 2.5
  Top Layer w0.254: v1(7.775,34.806) 8.396,34.806 cw(c8.396,34.552) 8.575,34.732 9.231,34.076 cw(c9.051,33.897) 9.305,33.897 9.305,33.665 U24.1@9.106,33.466
POW_ONOFF_TEC: R19.1 R416.2 R421.1 U36.1 | length 2.5
  Top Layer w0.254: v1(7.775,44.077) 8.396,44.077 cw(c8.396,43.823) 8.575,44.003 9.231,43.347 cw(c9.051,43.168) 9.305,43.168 9.305,42.936 U36.1@9.106,42.737
PRAM_MISO: U32.12 U33.2
PRAM_MOSI: U32.9 U33.5
PRAM_nCS: U32.4 U33.1
PRAM_SCK: U32.7 U33.6
SAM7_FLEX1_I2C_SCL: R329.2 R345.2 R515.1 U52.4
SAM7_FLEX1_I2C_SDA: R330.2 R343.2 R514.1 U52.5
SD2_CLK: J17.P5 R231.1 R485.1 U21.3
SD2_CMD: J17.P3 R232.1 R459.1 U22.6
SD2_DATA0: J17.P7 R227.1 R487.1 U21.6
SD2_DATA1: J17.P8 R228.1 R510.1 U21.1
SD2_DATA2: J17.P1 R229.1 R511.1 U22.3
SD2_DATA3: J17.P2 R230.1 R512.1 U22.4
SD2_nCD: J17.P9 R226.1 R513.1
SENSE1_N: R353.4 U52.12
SENSE1_P: R353.3 U52.11
SENSE2_N: R354.4 U52.14
SENSE2_P: R354.3 U52.13
SENSE3_N: R344.4 U52.7
SENSE3_P: R344.3 U52.8
SENSE4_N: R349.4 U52.9
SENSE4_P: R349.3 U52.10
SENSOR1_EN: R76.2 R213.1 U18.5
SENSOR2_EN: R78.2 R217.1 U19.5
SENSOR3_EN: R54.2 R462.1 U45.5
SENSOR4_EN: R56.2 R465.1 U46.5
SENSOR5_EN: R80.2 R225.1 U20.5
SENSOR_I2C1_SCL: R86.1 R206.2 R221.2 U18.2 U19.2 U20.2 U45.2 U46.2 U48.2 U49.13
SENSOR_I2C1_SDA: R81.1 R205.2 R220.2 U18.3 U19.3 U20.3 U45.3 U46.3 U48.4 U49.14
SHDN: R335.1 U29.R9
SOL_1_OUT1: J20.2
SOL_1_OUT2: J20.1
SOL_1_VREF: R257.2 R258.1 R260.2 R261.1 R263.2 R264.1 R266.2 R267.1
SOL_2_OUT1: J20.4
SOL_2_OUT2: J20.3
SOL_3_OUT1: J20.6
SOL_3_OUT2: J20.5
SOL_4_OUT1: J20.8
SOL_4_OUT2: J20.7
SOLENOID_A_1: DZ1.1 J29.2 Q11.3 | length 2.8
  Top Layer w0.254: Q11.3@92.964,68.691 v1(92.964,69.977)
  Bottom Layer w0.254: DZ1.1@94.517,68.326 94.517,69.857
SOLENOID_A_2: DZ2.1 J29.4 Q12.3 | length 2.8
  Top Layer w0.254: Q12.3@98.23,68.818 v1(98.23,70.104)
  Bottom Layer w0.254: DZ2.1@99.783,68.453 99.783,69.984
SOLENOID_A_3: DZ3.1 J29.6 Q13.3 | length 2.8
  Top Layer w0.254: Q13.3@103.497,68.818 v1(103.497,70.104)
  Bottom Layer w0.254: DZ3.1@105.05,68.453 105.05,69.984
SOLENOID_A_4: DZ4.1 J29.8 Q14.3 | length 2.8
  Top Layer w0.254: Q14.3@108.763,68.818 v1(108.763,70.104)
  Bottom Layer w0.254: DZ4.1@110.316,68.453 110.316,69.984
SOLENOID_A_5: DZ5.1 J30.2 Q15.3 | length 2.8
  Top Layer w0.254: Q15.3@114.029,68.802 v1(114.029,70.088)
  Bottom Layer w0.254: DZ5.1@115.582,68.437 115.582,69.968
SOLENOID_A_6: DZ6.1 J30.4 Q16.3 | length 2.8
  Top Layer w0.254: Q16.3@119.295,68.818 v1(119.295,70.104)
  Bottom Layer w0.254: DZ6.1@120.848,68.453 120.848,69.984
SOLENOID_A_7: DZ7.1 J30.6 Q17.3 | length 2.8
  Top Layer w0.254: Q17.3@124.562,68.818 v1(124.562,70.104)
  Bottom Layer w0.254: DZ7.1@126.115,68.453 126.115,69.984
SOLENOID_A_8: DZ8.1 J30.8 Q18.3 | length 2.8
  Top Layer w0.254: Q18.3@129.828,68.691 v1(129.828,69.977)
  Bottom Layer w0.254: DZ8.1@131.381,68.326 131.381,69.857
SOLENOID_A_9: DZ9.1 J32.2 Q19.3 | length 2.8
  Top Layer w0.254: Q19.3@156.159,68.716 v1(156.159,70.002)
  Bottom Layer w0.254: DZ9.1@157.712,68.351 157.712,69.883
SOLENOID_A_10: DZ10.1 J32.4 Q20.3 | length 2.8
  Top Layer w0.254: Q20.3@161.425,68.716 v1(161.425,70.002)
  Bottom Layer w0.254: DZ10.1@162.978,68.351 162.978,69.883
SOLENOID_A_11: DZ11.1 J32.6 Q21.3 | length 2.8
  Top Layer w0.254: Q21.3@166.692,68.716 v1(166.692,70.002)
  Bottom Layer w0.254: DZ11.1@168.245,68.351 168.245,69.883
SOLENOID_A_12: DZ12.1 J32.8 Q22.3 | length 2.8
  Top Layer w0.254: Q22.3@171.958,68.716 v1(171.958,70.002)
  Bottom Layer w0.254: DZ12.1@173.511,68.351 173.511,69.883
SOLENOID_A_13: DZ13.1 J33.2 Q23.3 | length 2.8
  Top Layer w0.254: Q23.3@135.094,68.716 v1(135.094,70.002)
  Bottom Layer w0.254: DZ13.1@136.647,68.351 136.647,69.883
SOLENOID_A_14: DZ14.1 J33.4 Q24.3 | length 2.8
  Top Layer w0.254: Q24.3@140.36,68.818 v1(140.36,70.104)
  Bottom Layer w0.254: DZ14.1@141.913,68.453 141.913,69.984
SOLENOID_A_15: DZ15.1 J33.6 Q25.3 | length 2.8
  Top Layer w0.254: Q25.3@145.627,68.716 v1(145.627,70.002)
  Bottom Layer w0.254: DZ15.1@147.18,68.351 147.18,69.883
SOLENOID_A_16: DZ16.1 J33.8 Q26.3 | length 2.8
  Top Layer w0.254: Q26.3@150.893,68.716 v1(150.893,70.002)
  Bottom Layer w0.254: DZ16.1@152.446,68.351 152.446,69.883
SOLENOID_CTR_1: R466.2 U47.4
SOLENOID_CTR_2: R467.2 U47.5
SOLENOID_CTR_3: R468.2 U47.6
SOLENOID_CTR_4: R469.2 U47.7
SOLENOID_CTR_5: R474.2 U47.8
SOLENOID_CTR_6: R475.2 U47.9
SOLENOID_CTR_7: R476.2 U47.10
SOLENOID_CTR_8: R477.2 U47.11
SOLENOID_CTR_9: R201.2 U47.13
SOLENOID_CTR_10: R202.2 U47.14
SOLENOID_CTR_11: R491.2 U47.15
SOLENOID_CTR_12: R492.2 U47.16
SOLENOID_CTR_13: R497.2 U47.17
SOLENOID_CTR_14: R498.2 U47.18
SOLENOID_CTR_15: R499.2 U47.19
SOLENOID_CTR_16: R500.2 U47.20
SOM_CAM_CK_N: J24.5 R312.1
SOM_CAM_CK_P: J24.6 R314.1
SOM_CAM_D0_N: J24.1 R316.1
SOM_CAM_D0_P: J24.2 R318.1
SOM_CAM_D1_N: J24.3 R319.1
SOM_CAM_D1_P: J24.4 R320.1
SOM_CAM_I2C_SCL: J24.9 R520.1
SOM_CAM_I2C_SDA: J24.8 R522.1
SOM_CANRX0: R519.1 U39.4
SOM_CANRX1: R523.1 U40.4
SOM_CANTX0: R517.1 U39.1
SOM_CANTX1: R521.1 U40.1
SOM_CONSOLE_RX: J18.3 R245.1 R518.1
SOM_CONSOLE_TX: J18.2 R244.1 R516.1
SOM_EMMC_nRST: R243.1 R360.1 U23.M5@83.264,38.688
SOM_MRAM_QSPI_CLK: R385.1 U42.6
SOM_MRAM_QSPI_IO0: R383.1 U42.5
SOM_MRAM_QSPI_IO1: R382.1 U42.2
SOM_MRAM_QSPI_IO2: R380.1 U42.3
SOM_MRAM_QSPI_IO3: R378.1 U42.7
SOM_PHOTO_ADC_CONV: J22.8 R275.2 R387.1
SOM_PHOTO_ADC_EOC: J22.9 R276.2 R524.1
SOM_PHOTO_ADC_nCS: J22.7 R274.2 R370.1
SOM_PHOTO_SPI_MISO: J22.5 R364.1
SOM_PHOTO_SPI_MOSI: J22.4 R362.1
SOM_PHOTO_SPI_SCK: J22.3 R367.1
SOM_PHOTO_SW_nCS: J22.6 R273.2 R359.1
SOM_PRAM_nCS: R287.1 R456.1 U32.3
SOM_PRAM_SPI_MISO: R458.1 U32.13
SOM_PRAM_SPI_MOSI: R457.1 U32.10
SOM_PRAM_SPI_SCK: R395.1 U32.6
SOM_RAM_QSPI_nCS: R384.1 R455.1 U42.1
SOM_SDMMC0_OUT_CK: R242.1 R355.1 U23.P6@84.264,36.688
SOM_SDMMC0_OUT_CMD: R241.1 R357.1 U23.P5@83.264,36.688
SOM_SDMMC0_OUT_D0: R240.1 R363.1 U23.K2@80.264,40.688
SOM_SDMMC0_OUT_D1: R239.1 R365.1 U23.N2@80.264,37.688
SOM_SDMMC0_OUT_D2: R238.1 R368.1 U23.K3@81.264,40.688
SOM_SDMMC0_OUT_D3: R237.1 R371.1 U23.N3@81.264,37.688
SOM_SDMMC0_OUT_D4: R236.1 R373.1 U23.N8@86.264,37.688
SOM_SDMMC0_OUT_D5: R235.1 R375.1 U23.K8@86.264,40.688
SOM_SDMMC0_OUT_D6: R234.1 R377.1 U23.N9@87.264,37.688
SOM_SDMMC0_OUT_D7: R233.1 R379.1 U23.K9@87.264,40.688
SOM_SDMMC0_OUT_DS: R381.1 U23.K5@83.264,40.688
SOM_STATUS_LED_1: DS12.1 R531.1
SOM_STATUS_LED_2: DS13.1 R532.1
SOM_USB_LED_1: R113.1 R530.1
SOM_USB_LED_2: R118.1 R389.1
SOM_USB_N: R308.1 U4.3
SOM_USB_P: R309.1 U4.2
SOM_USB_PWR_EN1: R123.1 R374.1 U5.1
SOM_USB_PWR_EN2: R122.1 R376.1 U5.4
SOM_USB_SW_nOE: R111.2 R366.1 U4.15
SOM_USB_SW_SEL0: R116.1 R369.1 U4.6
SOM_USB_SW_SEL1: R115.1 R372.1 U4.5
TCK_SWCLK_PC26: J25.5 U29.H7
TDI_PC28: J25.4 U29.H6
TDO_PC29: J25.7 U29.A2
TEC_ADC_1: U6.20 U10.2
TEC_ADC_2: U8.20 U10.3
TEC_ADC_3: U7.20 U10.4
TEC_ADC_4: U9.20 U10.5
TEC_nCS_1: R95.2 R124.2 U6.15
TEC_nCS_2: R98.2 R134.2 U8.15
TEC_nCS_3: R100.2 R125.2 U7.15
TEC_nCS_4: R29.1 R135.2 U9.15
TEC_OUT_A_1: C43.2 C44.2 C55.2 J6.5 U6.8 U6.9
TEC_OUT_A_2: C65.2 C66.2 C77.2 J6.1 U8.8 U8.9
TEC_OUT_A_3: C45.2 C46.2 C56.2 J6.7 U7.8 U7.9
TEC_OUT_A_4: C67.2 C68.2 C78.2 J6.3 U9.8 U9.9
TEC_OUT_B_1: C55.1 C61.2 J6.6 L2.2 U6.12
TEC_OUT_B_2: C77.1 C83.2 J6.2 L4.2 U8.12
TEC_OUT_B_3: C56.1 C62.2 J6.8 L3.2 U7.12
TEC_OUT_B_4: C78.1 C84.2 J6.4 L5.2 U9.12
TEC_SPI_MISO: R103.2 R285.2 U6.18 U7.18 U8.18 U9.18 U32.14
TEC_SPI_MOSI: R104.2 U6.17 U7.17 U8.17 U9.17 U32.11
TEC_SPI_SCK: R102.2 U6.16 U7.16 U8.16 U9.16 U32.5
TEC_SWEN_1: R58.2 R130.1 U6.13
TEC_SWEN_2: R33.1 R140.1 U8.13
TEC_SWEN_3: R64.2 R132.1 U7.13
TEC_SWEN_4: R66.2 R142.1 U9.13
"TEMP _SENSOR": R107.2 U15.2
TMS_SWDIO_PC27: J25.8 U29.C1
USB1_N: J16.2 R304.1
USB1_P: J16.3 R305.1
USB_CONN_LED_1: J4.4 R114.2 | length 3.5
  Top Layer w0.254: R114.2@34.544,69.867 34.544,70.634 cw(c34.798,70.634) 34.618,70.813 35.441,71.636 ccw(c35.261,71.816) 35.515,71.816 35.515,72.793 J4.4@35.62,72.898
USB_PWR1: D3.5 J4.1 Q1.2 R112.1 R121.1 U5.8 | length 8.3
  Top Layer w0.254: v1(36.901,70.541) D3.5@36.921,70.541 ; v1(39.37,71.12) J4.1@39.37,72.898
  Bottom Layer w0.254: v1(36.901,70.541) 37.698,70.541 37.847,70.392 Q1.2@37.847,70.286 ; Q1.2@37.871,70.286 38.044,70.81 38.28,71.046 cw(c38.459,70.866) 38.459,71.12 39.646,71.12 cw(c39.646,70.866) 39.825,71.046 40.037,70.834 cw(c39.857,70.655) 40.111,70.655 40.111,69.172 cw(c39.857,69.172) 40.037,68.993 39.973,68.929 cw(c39.794,69.109) 39.794,68.855 39.52,68.855 R112.1@39.37,68.817
USB_PWR2: D4.5 J5.1 Q2.2 R117.1 R120.1 U5.5 | length 8.3
  Top Layer w0.254: v1(49.855,70.541) D4.5@49.875,70.541 ; v1(52.324,71.12) J5.1@52.324,72.898
  Bottom Layer w0.254: v1(49.855,70.541) 50.652,70.541 50.801,70.392 Q2.2@50.801,70.286 ; Q2.2@50.825,70.286 50.998,70.81 51.234,71.046 cw(c51.413,70.866) 51.413,71.12 v1(52.324,71.12) 52.6,71.12 cw(c52.6,70.866) 52.779,71.046 52.967,70.858 cw(c52.787,70.679) 53.041,70.679 53.041,69.148 cw(c52.787,69.148) 52.967,68.969 52.926,68.928 cw(c52.746,69.108) 52.746,68.854 52.474,68.854 R117.1@52.324,68.817